# EAGLE board adapter_panel (EAGLE 8.0.1)
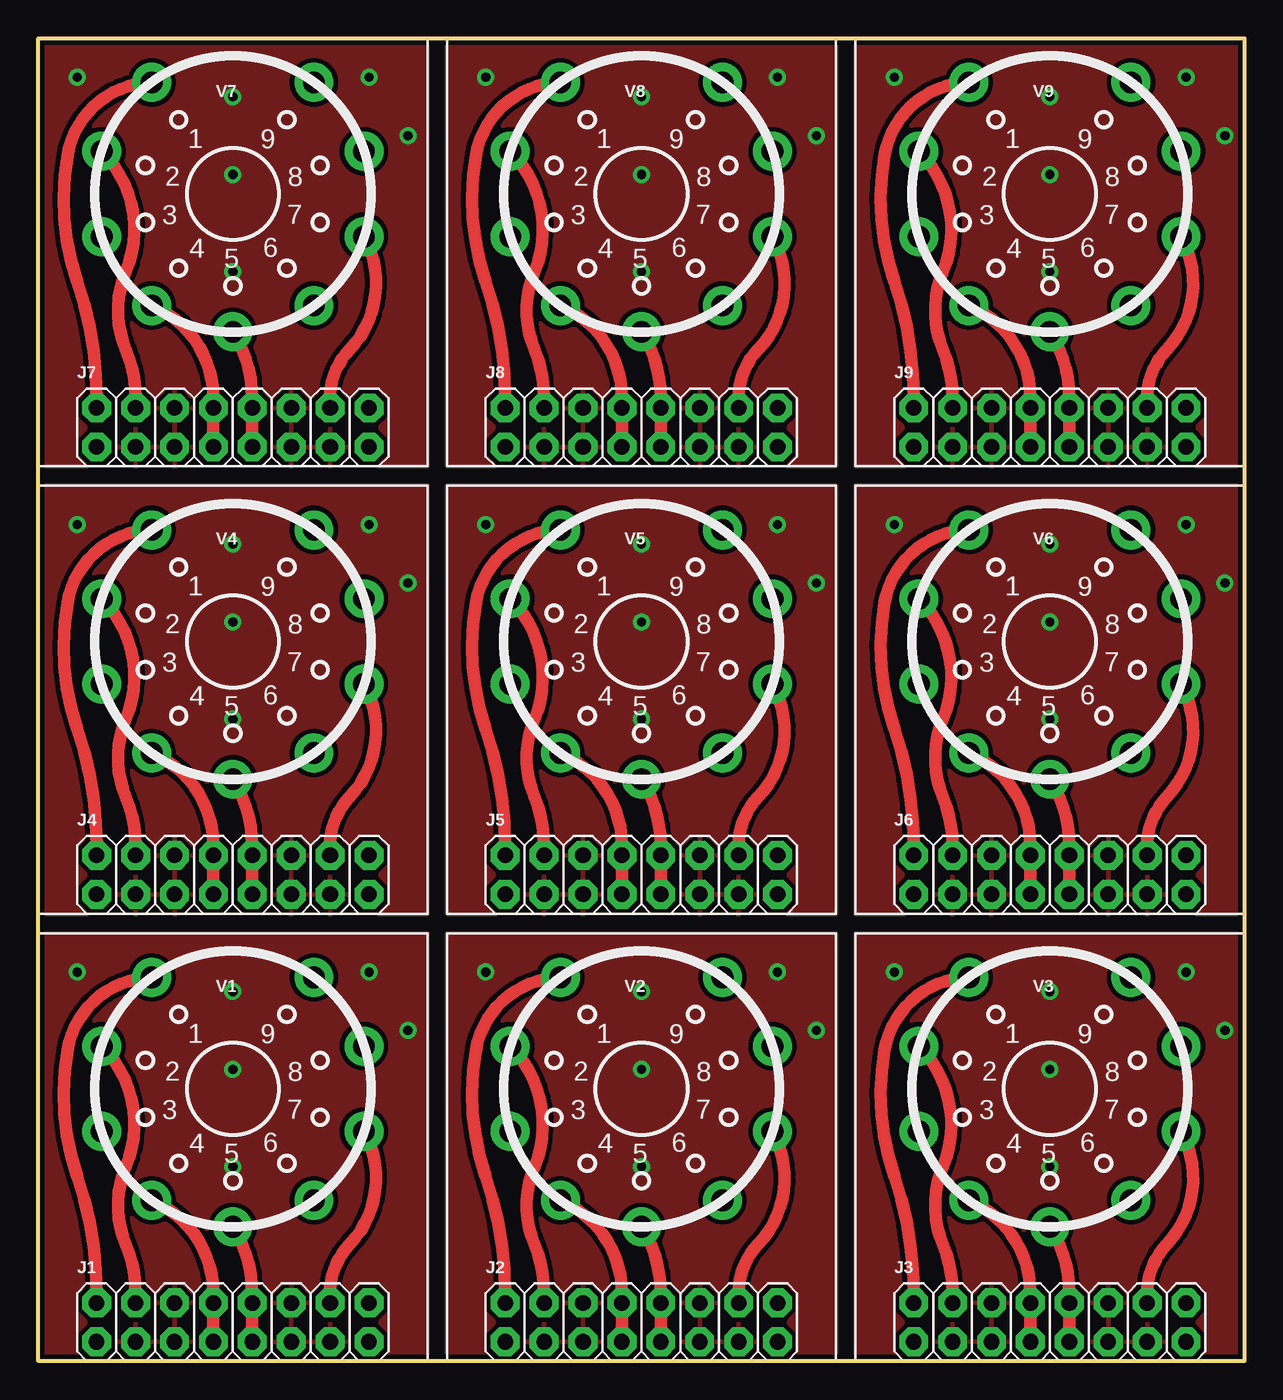
[diagram p0: board, top side]
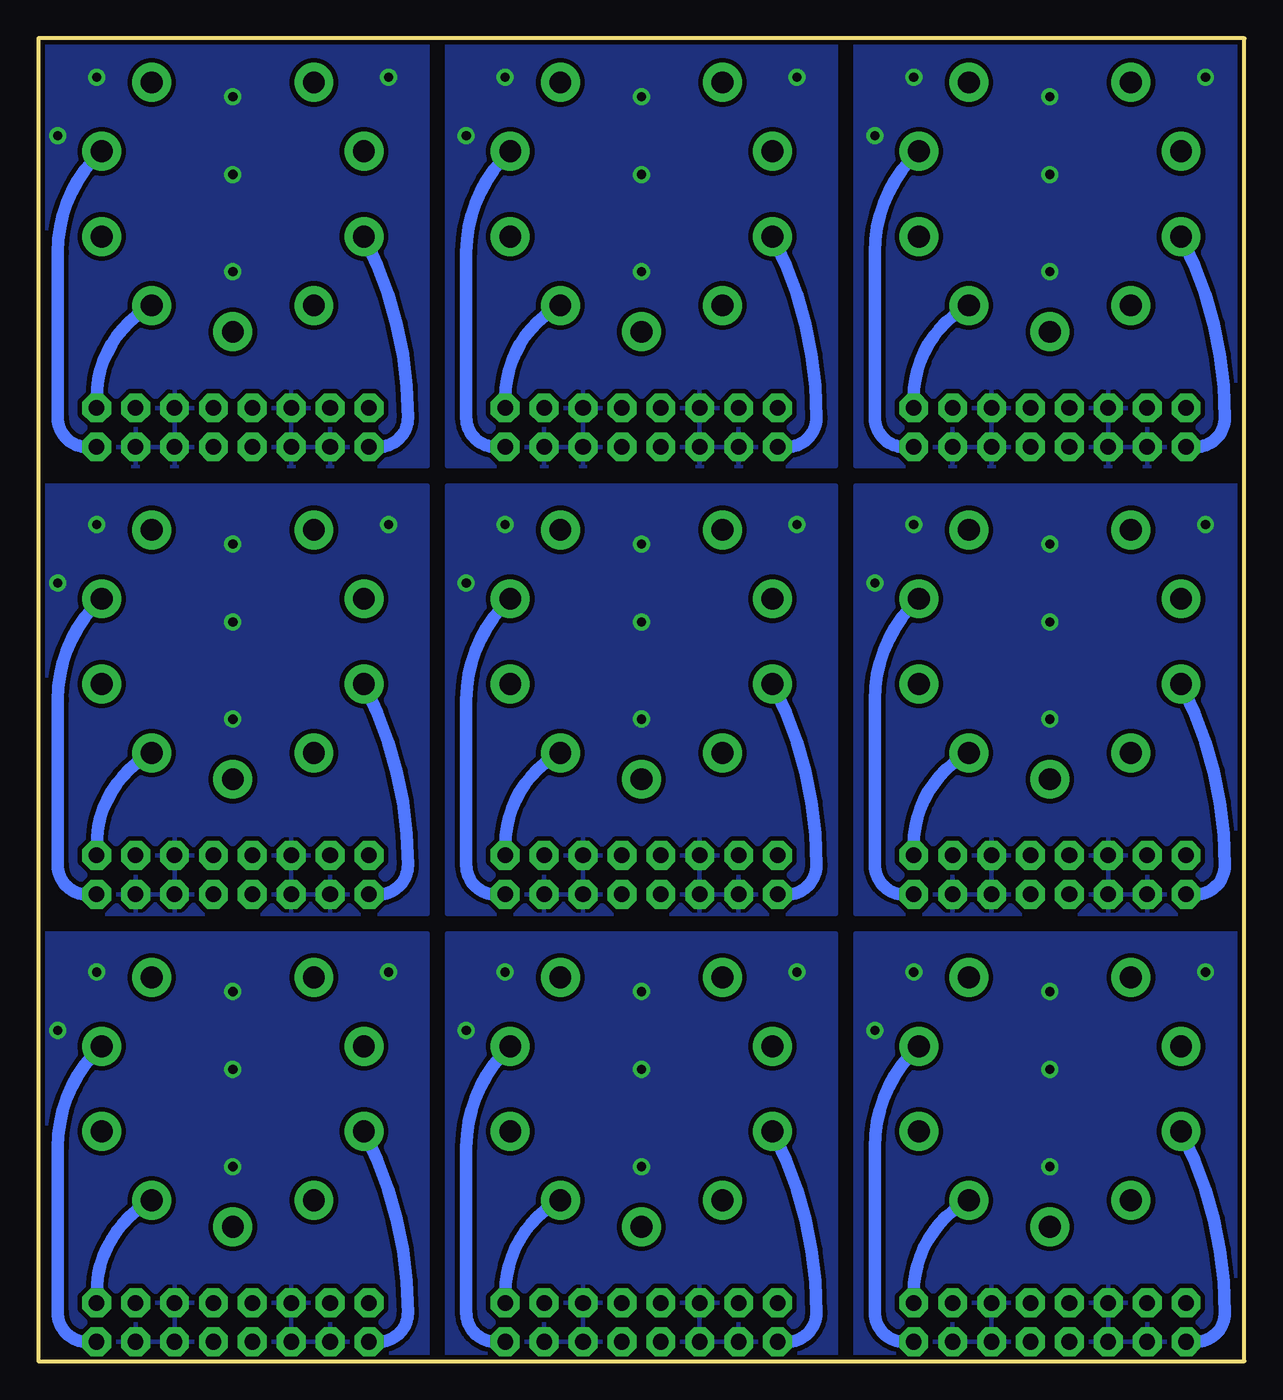
[diagram p1: board, bottom side, seen from below]

Size 78.74 x 86.36 mm. Coordinates in mm from the lower left corner, seen from the top.
Outline: 0,86.36 78.74,86.36 78.74,0 0,0 0,86.36
Copper layers (1*16): Top 0.035mm / dielectric 1.5mm / Bottom 0.035mm
Design rules "SeeedStudio_2layer_DRU_no_angle_20140221 *": minimum track width 6mil, minimum drill 12mil, track to track 12mil, track to pad 12mil, pad to pad 12mil, via to via 12mil, smd to smd 0mil, copper to edge 12mil, drill to drill 12mil, minimum pad ring 10mil, minimum via ring 10mil, stop-mask expansion 2mil, vias tented up to drill 100mil, thermal gap 10mil
tKeepout: area 1.7,6.8 to 23.7,28.8; area 28.4,6.8 to 50.4,28.8; area 55,6.8 to 77,28.8; area 1.7,36 to 23.7,58; area 28.4,36 to 50.4,58; area 55,36 to 77,58; area 1.7,65.2 to 23.7,87.2; area 28.4,65.2 to 50.4,87.2; area 55,65.2 to 77,87.2

## Footprints (pad centres in the part's own frame; a part is rotated, then mirrored left to right if it is on the bottom)
2X8 = drill 1.016 pad 1.88 octagon: 1 0,0; 2 0,2.54; 3 2.54,0; 4 2.54,2.54; 5 5.08,0; 6 5.08,2.54; 7 7.62,0; 8 7.62,2.54; 9 10.16,0; 10 10.16,2.54; 11 12.7,0; 12 12.7,2.54; 13 15.24,0; 14 15.24,2.54; 15 17.78,0; 16 17.78,2.54
NOVAL-18MM = drill 1.422 pad 2.54: 1 5.29,-7.281; 2 8.56,-2.781; 3 8.56,2.781; 4 5.29,7.281; 5 0,9; 6 -5.29,7.281; 7 -8.56,2.781; 8 -8.56,-2.781; 9 -5.29,-7.281

## Placement (x,y rotation side)
J1  [2X8]  3.81,1.27 0 top
J2  [2X8]  30.48,1.27 0 top
J3  [2X8]  57.15,1.27 0 top
J4  [2X8]  3.81,30.48 0 top
J5  [2X8]  30.48,30.48 0 top
J6  [2X8]  57.15,30.48 0 top
J7  [2X8]  3.81,59.69 0 top
J8  [2X8]  30.48,59.69 0 top
J9  [2X8]  57.15,59.69 0 top
V1  [NOVAL-18MM]  12.7,17.78 180 top
V2  [NOVAL-18MM]  39.37,17.78 180 top
V3  [NOVAL-18MM]  66.04,17.78 180 top
V4  [NOVAL-18MM]  12.7,46.99 180 top
V5  [NOVAL-18MM]  39.37,46.99 180 top
V6  [NOVAL-18MM]  66.04,46.99 180 top
V7  [NOVAL-18MM]  12.7,76.2 180 top
V8  [NOVAL-18MM]  39.37,76.2 180 top
V9  [NOVAL-18MM]  66.04,76.2 180 top

## Library data of the parts
J1-J9 = SparkFun-Connectors
V1-V9 = my-tubes

## Nets
AG: J1.4 V1.2
AG1: J2.4 V2.2
AG2: J3.4 V3.2
AG3: J4.4 V4.2
AG4: J5.4 V5.2
AG5: J6.4 V6.2
AG6: J7.4 V7.2
AG7: J8.4 V8.2
AG8: J9.4 V9.2
AK: J1.1 V1.3
AK1: J2.1 V2.3
AK2: J3.1 V3.3
AK3: J4.1 V4.3
AK4: J5.1 V5.3
AK5: J6.1 V6.3
AK6: J7.1 V7.3
AK7: J8.1 V8.3
AK8: J9.1 V9.3
AP: J1.2 V1.1
AP1: J2.2 V2.1
AP2: J3.2 V3.1
AP3: J4.2 V4.1
AP4: J5.2 V5.1
AP5: J6.2 V6.1
AP6: J7.2 V7.1
AP7: J8.2 V8.1
AP8: J9.2 V9.1
BG: J1.14 V1.7
BG1: J2.14 V2.7
BG2: J3.14 V3.7
BG3: J4.14 V4.7
BG4: J5.14 V5.7
BG5: J6.14 V6.7
BG6: J7.14 V7.7
BG7: J8.14 V8.7
BG8: J9.14 V9.7
BK: J1.15 V1.8
BK1: J2.15 V2.8
BK2: J3.15 V3.8
BK3: J4.15 V4.8
BK4: J5.15 V5.8
BK5: J6.15 V6.8
BK6: J7.15 V7.8
BK7: J8.15 V8.8
BK8: J9.15 V9.8
BP: J1.16 V1.6
BP1: J2.16 V2.6
BP2: J3.16 V3.6
BP3: J4.16 V4.6
BP4: J5.16 V5.6
BP5: J6.16 V6.6
BP6: J7.16 V7.6
BP7: J8.16 V8.6
BP8: J9.16 V9.6
GND: J1.3 J1.5 J1.6 J1.11 J1.12 J1.13
GND1: J2.3 J2.5 J2.6 J2.11 J2.12 J2.13
GND2: J3.3 J3.5 J3.6 J3.11 J3.12 J3.13
GND3: J4.3 J4.5 J4.6 J4.11 J4.12 J4.13
GND4: J5.3 J5.5 J5.6 J5.11 J5.12 J5.13
GND5: J6.3 J6.5 J6.6 J6.11 J6.12 J6.13
GND6: J7.3 J7.5 J7.6 J7.11 J7.12 J7.13
GND7: J8.3 J8.5 J8.6 J8.11 J8.12 J8.13
GND8: J9.3 J9.5 J9.6 J9.11 J9.12 J9.13
H1: J1.9 J1.10 V1.5
H2: J1.7 J1.8 V1.4
H3: J2.9 J2.10 V2.5
H4: J2.7 J2.8 V2.4
H5: J3.9 J3.10 V3.5
H6: J3.7 J3.8 V3.4
H7: J4.9 J4.10 V4.5
H8: J4.7 J4.8 V4.4
H9: J5.9 J5.10 V5.5
H10: J5.7 J5.8 V5.4
H11: J6.9 J6.10 V6.5
H12: J6.7 J6.8 V6.4
H13: J7.9 J7.10 V7.5
H14: J7.7 J7.8 V7.4
H15: J8.9 J8.10 V8.5
H16: J8.7 J8.8 V8.4
H17: J9.9 J9.10 V9.5
H18: J9.7 J9.8 V9.4

## Tracks (layer width: path | path; a pad name or v marks a point on that pad's centre or on a via)
AG
  Top 0.813: J1.4 6.35,4.45 arc23 5.71,7.62 arc-45 5.71,12.7 arc68 V1.2
AG1
  Top 0.813: J2.4 33.02,4.45 arc23 32.38,7.62 arc-45 32.38,12.7 arc68 V2.2
AG2
  Top 0.813: J3.4 59.69,4.45 arc23 59.05,7.62 arc-45 59.05,12.7 arc68 V3.2
AG3
  Top 0.813: J4.4 6.35,33.66 arc23 5.71,36.83 arc-45 5.71,41.91 arc68 V4.2
AG4
  Top 0.813: J5.4 33.02,33.66 arc23 32.38,36.83 arc-45 32.38,41.91 arc68 V5.2
AG5
  Top 0.813: J6.4 59.69,33.66 arc23 59.05,36.83 arc-45 59.05,41.91 arc68 V6.2
AG6
  Top 0.813: J7.4 6.35,62.87 arc23 5.71,66.04 arc-45 5.71,71.12 arc68 V7.2
AG7
  Top 0.813: J8.4 33.02,62.87 arc23 32.38,66.04 arc-45 32.38,71.12 arc68 V8.2
AG8
  Top 0.813: J9.4 59.69,62.87 arc23 59.05,66.04 arc-45 59.05,71.12 arc68 V9.2
AK
  Bottom 0.813: J1.1 3.17,1.27 arc-90 1.27,3.17 arc-27 V1.3
AK1
  Bottom 0.813: J2.1 29.84,1.27 arc-90 27.94,3.17 arc-27 V2.3
AK2
  Bottom 0.813: J3.1 56.52,1.27 arc-90 54.61,3.17 arc-27 V3.3
AK3
  Bottom 0.813: J4.1 3.17,30.48 arc-90 1.27,32.38 arc-27 V4.3
AK4
  Bottom 0.813: J5.1 29.84,30.48 arc-90 27.94,32.38 arc-27 V5.3
AK5
  Bottom 0.813: J6.1 56.52,30.48 arc-90 54.61,32.38 arc-27 V6.3
AK6
  Bottom 0.813: J7.1 3.17,59.69 arc-90 1.27,61.59 arc-27 V7.3
AK7
  Bottom 0.813: J8.1 29.84,59.69 arc-90 27.94,61.59 arc-27 V8.3
AK8
  Bottom 0.813: J9.1 56.52,59.69 arc-90 54.61,61.59 arc-27 V9.3
AP
  Top 0.813: J1.2 3.81,4.45 arc19 2.54,12.06 arc-29 1.91,20.32 arc-78 V1.1
AP1
  Top 0.813: J2.2 30.48,4.45 arc19 29.21,12.06 arc-29 28.57,20.32 arc-78 V2.1
AP2
  Top 0.813: J3.2 57.15,4.45 arc19 55.88,12.06 arc-29 55.24,20.32 arc-78 V3.1
AP3
  Top 0.813: J4.2 3.81,33.66 arc19 2.54,41.27 arc-29 1.91,49.53 arc-78 V4.1
AP4
  Top 0.813: J5.2 30.48,33.66 arc19 29.21,41.27 arc-29 28.57,49.53 arc-78 V5.1
AP5
  Top 0.813: J6.2 57.15,33.66 arc19 55.88,41.27 arc-29 55.24,49.53 arc-78 V6.1
AP6
  Top 0.813: J7.2 3.81,62.87 arc19 2.54,70.48 arc-29 1.91,78.74 arc-78 V7.1
AP7
  Top 0.813: J8.2 30.48,62.87 arc19 29.21,70.48 arc-29 28.57,78.74 arc-78 V8.1
AP8
  Top 0.813: J9.2 57.15,62.87 arc19 55.88,70.48 arc-29 55.24,78.74 arc-78 V9.1
BG
  Top 0.813: J1.14 19.05,4.45 arc-44 20.32,7.62 arc73 V1.7
BG1
  Top 0.813: J2.14 45.72,4.45 arc-44 46.99,7.62 arc73 V2.7
BG2
  Top 0.813: J3.14 72.39,4.45 arc-44 73.66,7.62 arc73 V3.7
BG3
  Top 0.813: J4.14 19.05,33.66 arc-44 20.32,36.83 arc73 V4.7
BG4
  Top 0.813: J5.14 45.72,33.66 arc-44 46.99,36.83 arc73 V5.7
BG5
  Top 0.813: J6.14 72.39,33.66 arc-44 73.66,36.83 arc73 V6.7
BG6
  Top 0.813: J7.14 19.05,62.87 arc-44 20.32,66.04 arc73 V7.7
BG7
  Top 0.813: J8.14 45.72,62.87 arc-44 46.99,66.04 arc73 V8.7
BG8
  Top 0.813: J9.14 72.39,62.87 arc-44 73.66,66.04 arc73 V9.7
BK
  Bottom 0.813: J1.15 22.23,1.27 arc90 24.13,3.17 24.13,13.97 arc47 V1.8
BK1
  Bottom 0.813: J2.15 48.9,1.27 arc90 50.8,3.17 50.8,13.97 arc47 V2.8
BK2
  Bottom 0.813: J3.15 75.56,1.27 arc90 77.47,3.17 77.47,13.97 arc47 V3.8
BK3
  Bottom 0.813: J4.15 22.23,30.48 arc90 24.13,32.38 24.13,43.18 arc47 V4.8
BK4
  Bottom 0.813: J5.15 48.9,30.48 arc90 50.8,32.38 50.8,43.18 arc47 V5.8
BK5
  Bottom 0.813: J6.15 75.56,30.48 arc90 77.47,32.38 77.47,43.18 arc47 V6.8
BK6
  Bottom 0.813: J7.15 22.23,59.69 arc90 24.13,61.59 24.13,72.39 arc47 V7.8
BK7
  Bottom 0.813: J8.15 48.9,59.69 arc90 50.8,61.59 50.8,72.39 arc47 V8.8
BK8
  Bottom 0.813: J9.15 75.56,59.69 arc90 77.47,61.59 77.47,72.39 arc47 V9.8
BP
  Bottom 0.813: J1.16 21.59,4.45 arc61 V1.6
BP1
  Bottom 0.813: J2.16 48.26,4.45 arc61 V2.6
BP2
  Bottom 0.813: J3.16 74.93,4.45 arc61 V3.6
BP3
  Bottom 0.813: J4.16 21.59,33.66 arc61 V4.6
BP4
  Bottom 0.813: J5.16 48.26,33.66 arc61 V5.6
BP5
  Bottom 0.813: J6.16 74.93,33.66 arc61 V6.6
BP6
  Bottom 0.813: J7.16 21.59,62.87 arc61 V7.6
BP7
  Bottom 0.813: J8.16 48.26,62.87 arc61 V8.6
BP8
  Bottom 0.813: J9.16 74.93,62.87 arc61 V9.6
GND  (via drill 0.6)
  other vias: 2.54,25.4 12.7,24.13 21.59,25.4 12.7,19.05 24.13,21.59 12.7,12.7
  pour Top: 0,27.94 25.4,27.94 25.4,0 0,0
  pour Bottom: 0,27.94 25.4,27.94 25.4,0 0,0
GND1  (via drill 0.6)
  other vias: 29.21,25.4 39.37,24.13 48.26,25.4 39.37,19.05 50.8,21.59 39.37,12.7
  pour Top: 26.67,27.94 52.07,27.94 52.07,0 26.67,0
  pour Bottom: 26.67,27.94 52.07,27.94 52.07,0 26.67,0
GND2  (via drill 0.6)
  other vias: 55.88,25.4 66.04,24.13 74.93,25.4 66.04,19.05 77.47,21.59 66.04,12.7
  pour Top: 53.34,27.94 78.74,27.94 78.74,0 53.34,0
  pour Bottom: 53.34,27.94 78.74,27.94 78.74,0 53.34,0
GND3  (via drill 0.6)
  other vias: 2.54,54.61 12.7,53.34 21.59,54.61 12.7,48.26 24.13,50.8 12.7,41.91
  pour Top: 0,57.15 25.4,57.15 25.4,29.21 0,29.21
  pour Bottom: 0,57.15 25.4,57.15 25.4,29.21 0,29.21
GND4  (via drill 0.6)
  other vias: 29.21,54.61 39.37,53.34 48.26,54.61 39.37,48.26 50.8,50.8 39.37,41.91
  pour Top: 26.67,57.15 52.07,57.15 52.07,29.21 26.67,29.21
  pour Bottom: 26.67,57.15 52.07,57.15 52.07,29.21 26.67,29.21
GND5  (via drill 0.6)
  other vias: 55.88,54.61 66.04,53.34 74.93,54.61 66.04,48.26 77.47,50.8 66.04,41.91
  pour Top: 53.34,57.15 78.74,57.15 78.74,29.21 53.34,29.21
  pour Bottom: 53.34,57.15 78.74,57.15 78.74,29.21 53.34,29.21
GND6  (via drill 0.6)
  other vias: 2.54,83.82 12.7,82.55 21.59,83.82 12.7,77.47 24.13,80.01 12.7,71.12
  pour Top: 0,86.36 25.4,86.36 25.4,58.42 0,58.42
  pour Bottom: 0,86.36 25.4,86.36 25.4,58.42 0,58.42
GND7  (via drill 0.6)
  other vias: 29.21,83.82 39.37,82.55 48.26,83.82 39.37,77.47 50.8,80.01 39.37,71.12
  pour Top: 26.67,86.36 52.07,86.36 52.07,58.42 26.67,58.42
  pour Bottom: 26.67,86.36 52.07,86.36 52.07,58.42 26.67,58.42
GND8  (via drill 0.6)
  other vias: 55.88,83.82 66.04,82.55 74.93,83.82 66.04,77.47 77.47,80.01 66.04,71.12
  pour Top: 53.34,86.36 78.74,86.36 78.74,58.42 53.34,58.42
  pour Bottom: 53.34,86.36 78.74,86.36 78.74,58.42 53.34,58.42
H1
  Top 0.813: V1.5 arc-33 13.97,4.45 J1.10 J1.9
H2
  Top 0.813: V1.4 arc-67 11.43,4.45 J1.8 J1.7
H3
  Top 0.813: V2.5 arc-33 40.64,4.45 J2.10 J2.9
H4
  Top 0.813: V2.4 arc-67 38.1,4.45 J2.8 J2.7
H5
  Top 0.813: V3.5 arc-33 67.31,4.45 J3.10 J3.9
H6
  Top 0.813: V3.4 arc-67 64.77,4.45 J3.8 J3.7
H7
  Top 0.813: V4.5 arc-33 13.97,33.66 J4.10 J4.9
H8
  Top 0.813: V4.4 arc-67 11.43,33.66 J4.8 J4.7
H9
  Top 0.813: V5.5 arc-33 40.64,33.66 J5.10 J5.9
H10
  Top 0.813: V5.4 arc-67 38.1,33.66 J5.8 J5.7
H11
  Top 0.813: V6.5 arc-33 67.31,33.66 J6.10 J6.9
H12
  Top 0.813: V6.4 arc-67 64.77,33.66 J6.8 J6.7
H13
  Top 0.813: V7.5 arc-33 13.97,62.87 J7.10 J7.9
H14
  Top 0.813: V7.4 arc-67 11.43,62.87 J7.8 J7.7
H15
  Top 0.813: V8.5 arc-33 40.64,62.87 J8.10 J8.9
H16
  Top 0.813: V8.4 arc-67 38.1,62.87 J8.8 J8.7
H17
  Top 0.813: V9.5 arc-33 67.31,62.87 J9.10 J9.9
H18
  Top 0.813: V9.4 arc-67 64.77,62.87 J9.8 J9.7